# Altium PCB BoardBig2.PcbDoc
Units mil, origin at the board's own origin, x right, y up, seen from the top; angles counter-clockwise.
Board outline 6000 x 4000 mil, 2 copper layers (Top Layer, Bottom Layer); 39 components, 44 nets, 163 pads, 0 vias.
Unrouted connection lines stored in the file: 88.
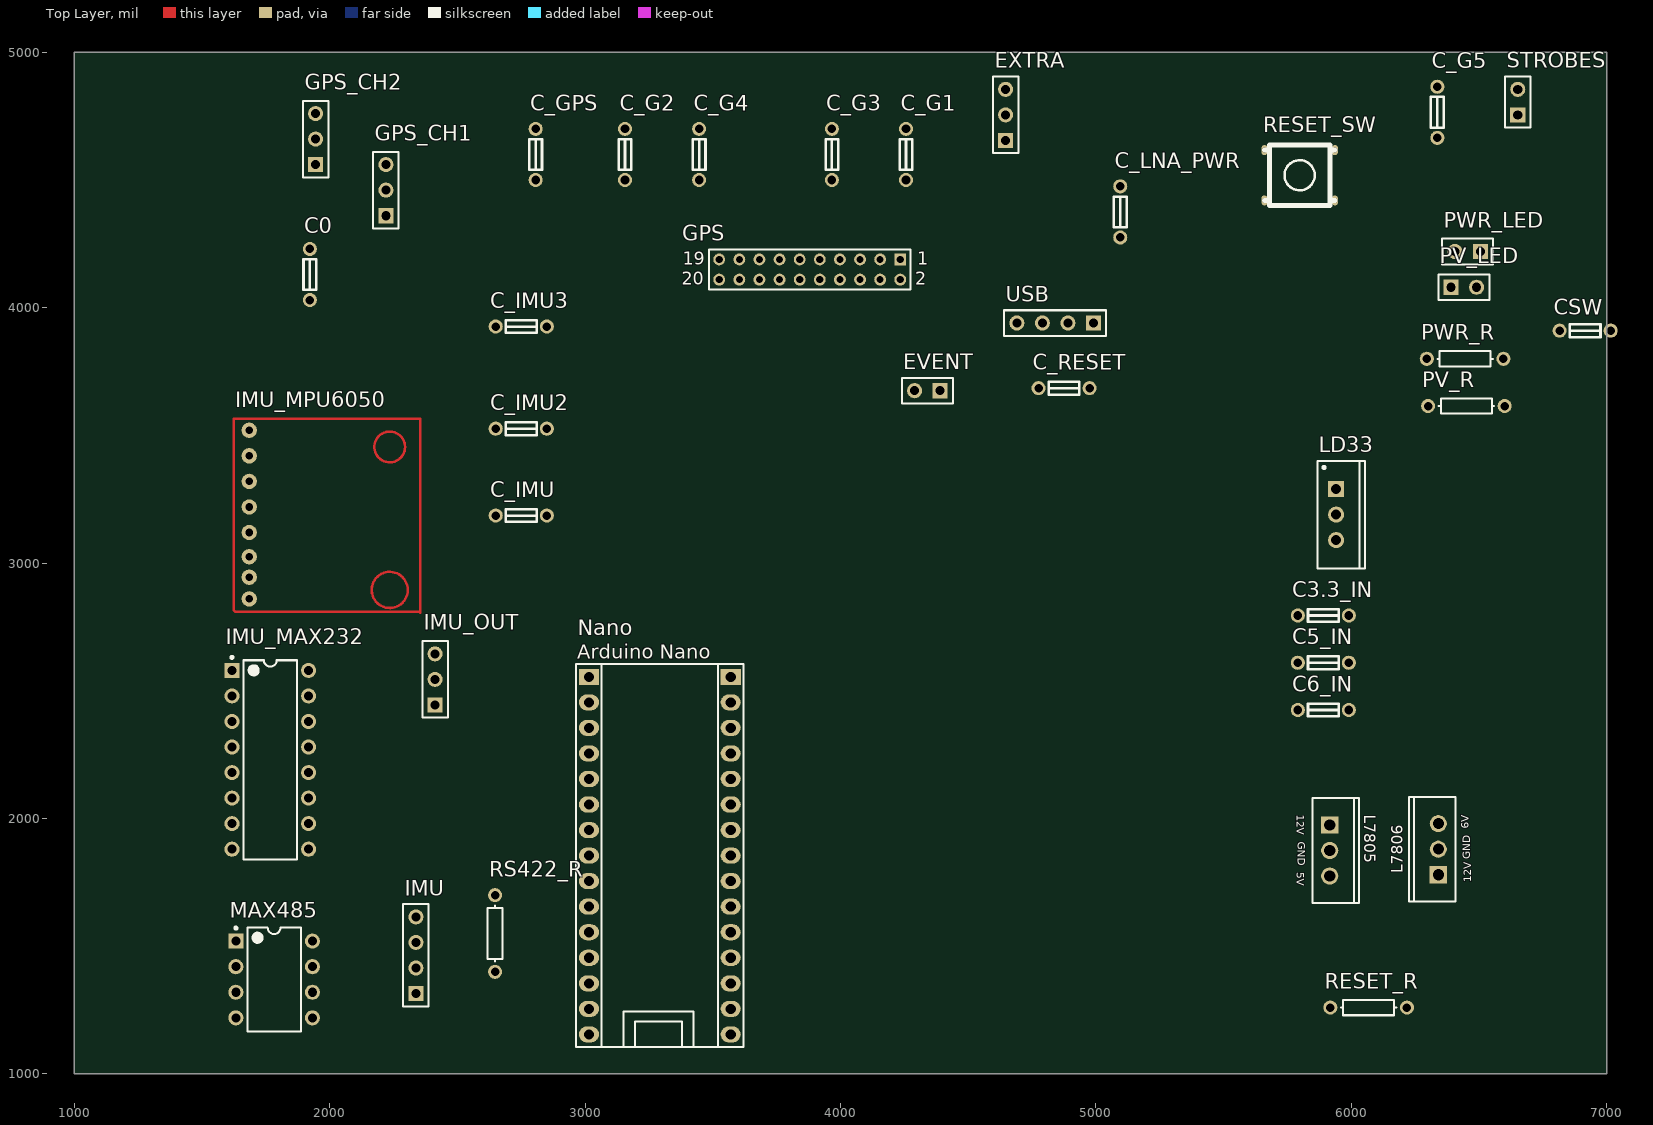
[diagram p0: Top Layer view]
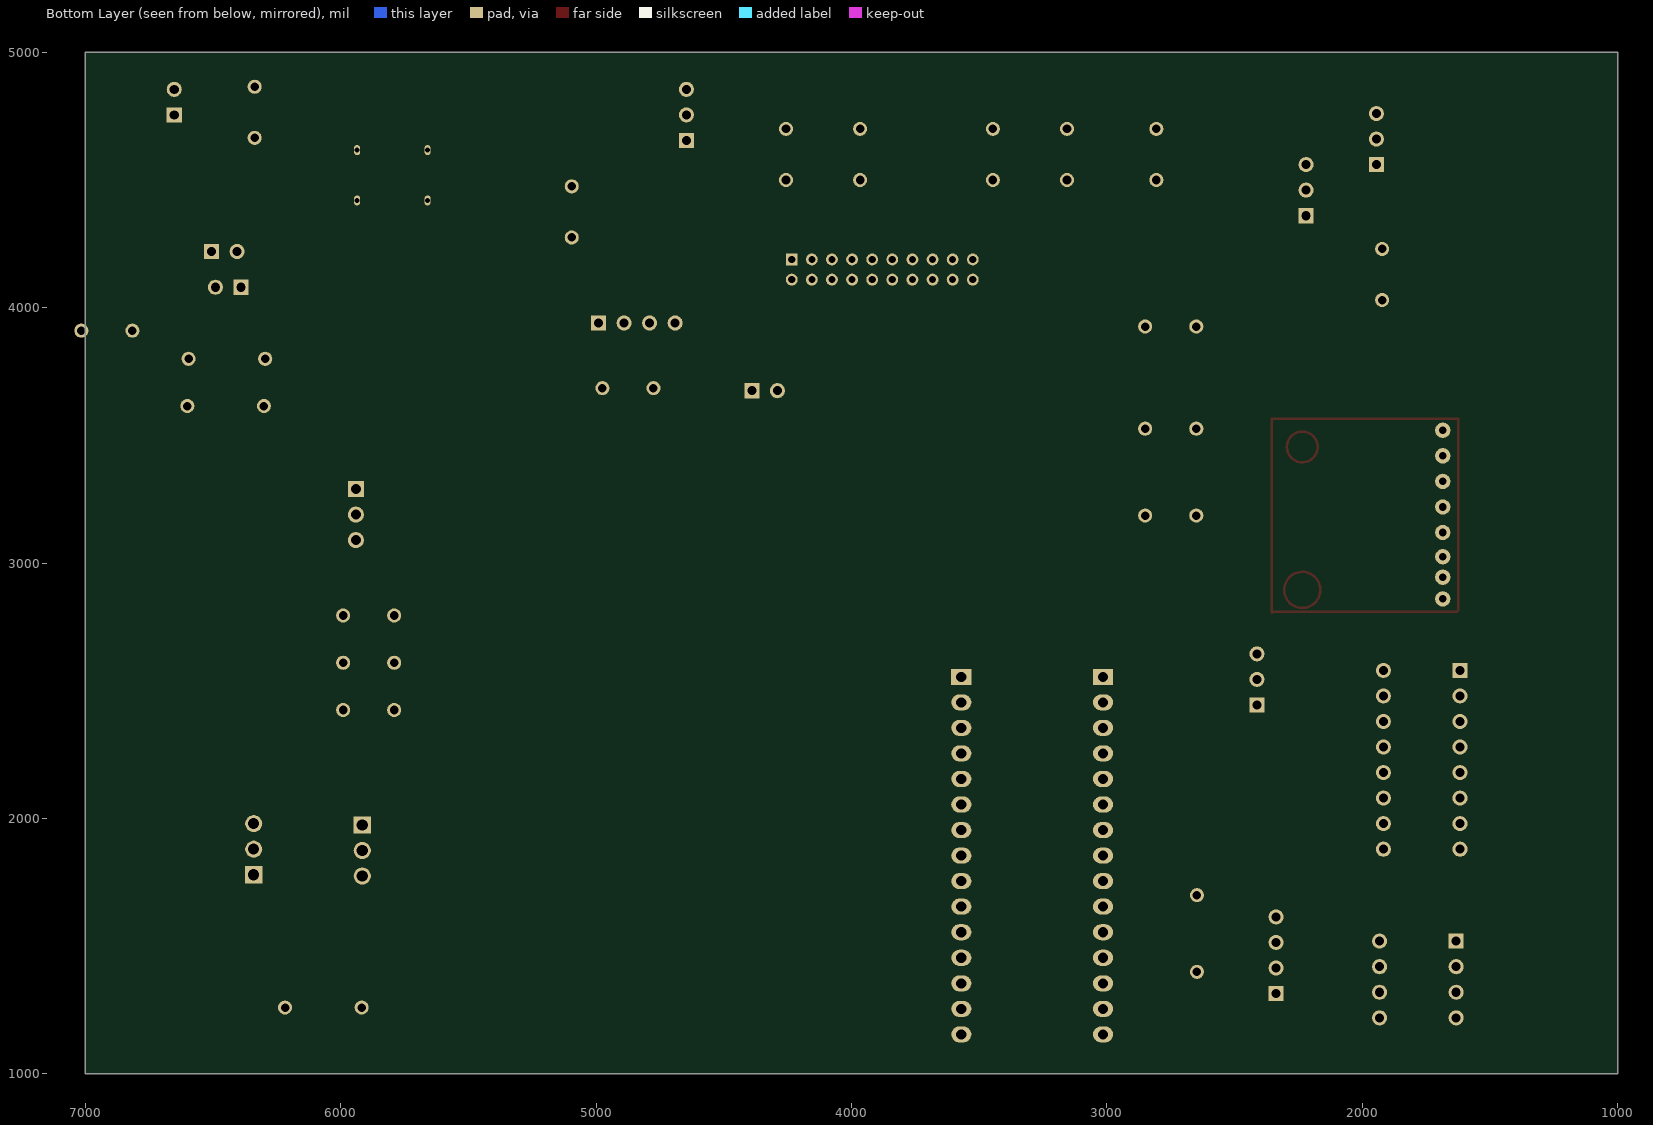
[diagram p1: Bottom Layer view, seen from below]

## Layer stack, top to bottom
Top Solder: solder mask 0.4, Solder Resist, Dk 3.5
Top Layer: signal copper 1.4
Dielectric 1: dielectric 12.6, FR-4, Dk 4.8
Bottom Layer: signal copper 1.4
Bottom Solder: solder mask 0.4, Solder Resist, Dk 3.5

## Board outline
1000,1000 7000,1000 7000,5000 1000,5000

## Design rules (kind name [scope] priority, off if disabled: settings)
Clearance [All] p1: gap=10 ignorepadtopadclearanceinfootprint=FALSE except(0: Arc-Hole Track-Hole SMDPad-Hole THPad-Hole Via-Hole Fill-Hole Poly-Hole Region-Hole Text-Hole)
PolygonConnect [All] p1: connectstyle=Relief reliefconductorwidth=10 reliefentries=4 polygonreliefangle="90 Angle" airgapwidth=10
RoomDefinition schematic [InComponentClass('schematic')] p1: confinementstyle=ConfineIn formatcopy=TRUE lockcomponents=FALSE outline 926.18,800 7557.44,800 7557.44,5015 926.18,5015
RoutingVias [All] p1: holewidth=28 width=50 viastyle="Through Hole" minholewidth=28 minwidth=50 maxholewidth=28 maxwidth=50
SolderMaskExpansion [All] p1: expansion=4
Width [All] p1: maxlimit=10 minlimit=10 preferedwidth=10
30 further rules are at their usual default settings.

## Components (designator, comment, footprint, x,y, rotation, side; value= is the part's Value field where it differs from the comment)
C0 "100nF" C_NANO_HOLES 1922.44,4030 r90 top
C3.3_IN "100nF" C_NANO_HOLES 5790,2795 r0 top
C5_IN "100nF" C_NANO_HOLES 5990,2610 r180 top
C6_IN "100nF" C_NANO_HOLES 5990,2425 r180 top
C_G1 "100nF" C_NANO_HOLES 4256.18,4500 r90 top
C_G2 "100nF" C_NANO_HOLES 3156.18,4500 r90 top
C_G3 "100nF" C_NANO_HOLES 3966.18,4500 r90 top
C_G4 "100nF" C_NANO_HOLES 3446.18,4500 r90 top
C_G5 "100nF" C_NANO_HOLES 6336.18,4665 r90 top
C_GPS "100nF" C_NANO_HOLES 2806.18,4500 r90 top
C_IMU "100nF" C_NANO_HOLES 2850,3186.18 r180 top
C_IMU2 "100nF" C_NANO_HOLES 2850,3526.18 r180 top
C_IMU3 "100nF" C_NANO_HOLES 2850,3926.18 r180 top
C_LNA_PWR "100nF" C_NANO_HOLES 5095,4275 r90 top
C_RESET "100nF" C_NANO_HOLES 4775,3685 r0 top
CSW "100nF" C_NANO_HOLES 7015,3910 r180 top
EVENT "Header 2" HDR1X2 4390,3675 r180 top
EXTRA "Header 3" HDR1X3 4646.18,4655 r90 top
GPS "Header 10X2" HDR2x10_2mm 3525,4110 r0 top
GPS_CH1 "MHDR1X3" HDR1X3 2220,4360 r90 top
GPS_CH2 "MHDR1X3" HDR1X3 1945,4560 r90 top
IMU "Header 4" HDR1X4 2337.44,1315 r90 top
IMU_MAX232 "MAX232ACPE" PE16A 1767.44,2230 r0 top
IMU_MPU6050 "MPU6050" MPU6050 1685,2860 r0 top
IMU_OUT "MHDR1X3" HDR1X3 2412.44,2445 r90 top
L7805 "L7805ACV" TO220ABN 5915,1875 r270 top
L7806 "L7806CV" TO220ABN 6340,1880 r90 top
LD33 "LD33V" T03B 5940,3190 r270 top
MAX485 "MAX485CPA" PA8 1782.44,1370 r0 top
Nano "Arduino Nano" ArduinoNano 3285,1815 r90 top
PV_LED "PV" HDR1X2 6390,4080 r0 top
PV_R "180" AXIAL-0.3 6450,3615 r0 top
PWR_LED "PWR" HDR1X2 6505,4220 r180 top
PWR_R "180" AXIAL-0.3 6445,3800 r0 top
RESET_R "4k7" AXIAL-0.3 6067.44,1260 r0 top
RESET_SW "SW-PB" PUSHBUTTON 5679.09,4400.31 r0 top
RS422_R "120" AXIAL-0.3 2647.44,1550 r90 top
STROBES "Header 2" HDR1X2 6651.18,4755 r90 top
USB "Header 4" HDR1X4 4990,3940 r180 top

## Footprints (in the part's own frame and the unit in brackets; to place one, negate y for a bottom-side part, rotate by r counter-clockwise, add the part's x,y. Pads: shape width x height; smd on the part's side, far side on the other; paste and mask are expansions set on the pad)
ArduinoNano [mm]
  rect 1.6x2 hole 1: 1(18.796,6.858) 30(18.796,-7.239)
  oval 1.6x2 hole 1: 2(16.256,6.858) 3(13.716,6.858) 4(11.176,6.858) 5(8.636,6.858) 6(6.096,6.858) 7(3.556,6.858) 8(1.016,6.858) 9(-1.524,6.858) 10(-4.064,6.858) 11(-6.604,6.858) 12(-9.144,6.858) 13(-11.684,6.858) 14(-14.224,6.858) 15(-16.764,6.858) 16(-16.764,-7.239) 17(-14.224,-7.239) 18(-11.684,-7.239) 19(-9.144,-7.239) 20(-6.604,-7.239) 21(-4.064,-7.239) 22(-1.524,-7.239) 23(1.016,-7.239) 24(3.556,-7.239) 25(6.096,-7.239) 26(8.636,-7.239) 27(11.176,-7.239) 28(13.716,-7.239) 29(16.256,-7.239)
  silkscreen extent -18.03,-8.51 20.07,8.13
AXIAL-0.3 [mm] "Axial Device, Thru-Hole; 2 Leads; 0.3 in Pin Spacing"
  round 1.4 hole 0.85: 1(-3.81,0) 2(3.81,0)
  silkscreen extent -2.77,-0.76 2.77,0.76
C_NANO_HOLES [mm] "C_NANO com furos maiores"
  round 1.4 hole 0.85: 1(0,0) 2(5.08,0)
  silkscreen extent 1.02,-0.63 4.06,0.64
HDR1X2 [mm] "Connector; Header; 2 Position"
  rect 1.5x1.5 hole 0.9: 1(0,0)
  round 1.5 hole 0.9: 2(2.54,0)
  silkscreen extent -1.27,-1.27 3.81,1.27
HDR1X3 [mm] "Connector; Header; 3 Position"
  rect 1.5x1.5 hole 0.9: 1(0,0)
  round 1.5 hole 0.9: 2(2.54,0) 3(5.08,0)
  silkscreen extent -1.27,-1.27 6.35,1.27
HDR1X4 [mm] "Connector; Header; 4 Position"
  rect 1.5x1.5 hole 0.9: 1(0,0)
  round 1.5 hole 0.9: 2(2.54,0) 3(5.08,0) 4(7.62,0)
  silkscreen extent -1.27,-1.27 8.89,1.27
HDR2x10_2mm [mm]
  rect 1.18x1.18 hole 0.71: 1(18,2)
  round 1.18 hole 0.71: 2(18,0) 3(16,2) 4(16,0) 5(14,2) 6(14,0) 7(12,2) 8(12,0) 9(10,2) 10(10,0) 11(8,2) 12(8,0) 13(6,2) 14(6,0) 15(4,2) 16(4,0) 17(2,2) 18(2,0) 19(0,2) 20(0,0)
  silkscreen extent -1,-1 19,3
MPU6050 [mil]
  round 60 hole 30: 0(0,660) 1(0,560) 2(0,460) 3(0,360) 4(0,260) 5(0,165) 6(0,85) 7(0,0)
  Top Layer circle w10: c550,35 r70.71
  Top Layer circle w10: c550,595 r60.21
  Top Layer lines w10: -60,-45 -60,705 -30,705 670,705 670,-55 665,-50 -55,-50 -60,-45
PA8 [mm] "DIP, 8-Leads, Row Spacing 7.62mm, Pitch 2.54mm, Body 9.38x7.24mm"
  rect 1.5x1.5 hole 0.9: 1(-3.81,3.81)
  round 1.5 hole 0.9: 2(-3.81,1.27) 3(-3.81,-1.27) 4(-3.81,-3.81) 5(3.81,-3.81) 6(3.81,-1.27) 7(3.81,1.27) 8(3.81,3.81)
  silkscreen extent -3.93,-5.15 2.65,5.23, body extent -3.6,-5.15 3.6,5.15, height 4.58
PE16A [mm] "DIP, 16-Leads, Row Spacing 7.62mm, Pitch 2.54mm, Body 19.18x6.99mm"
  rect 1.5x1.5 hole 0.9: 1(-3.81,8.89)
  round 1.5 hole 0.9: 2(-3.81,6.35) 3(-3.81,3.81) 4(-3.81,1.27) 5(-3.81,-1.27) 6(-3.81,-3.81) 7(-3.81,-6.35) 8(-3.81,-8.89) 9(3.81,-8.89) 10(3.81,-6.35) 11(3.81,-3.81) 12(3.81,-1.27) 13(3.81,1.27) 14(3.81,3.81) 15(3.81,6.35) 16(3.81,8.89)
  silkscreen extent -3.93,-9.9 2.65,10.31, body extent -3.3,-9.9 3.3,9.9, height 5.08
PUSHBUTTON [mm]
  oval 0.6x1 hole 0.5: 1(-0.5,0.5) 1(-0.5,5.5) 2(6.5,0.5) 2(6.5,5.5)
  silkscreen extent -0.5,0 6.5,6
T03B [mm] "TO, Thru-Hole, Vertical, Heatsink Mounted; 3 In-Line Leads; Pitch 2.54 mm"
  rect 1.6x1.6 hole 1: 1(-2.54,0)
  round 1.6 hole 1: 2(0,0) 3(2.54,0)
  silkscreen extent -5.35,-1.85 5.35,2.85, body extent -5.4,-1.9 5.4,2.9, height 19.4
TO220ABN [mm] "TO, Thru-Hole, Vertical, Heatsink Mounted; 3 In-Line Leads; Pitch 2.54 mm; Pin sequence 1, 3, 2"
  rect 1.7x1.7 hole 1.1: 1(-2.54,0)
  round 1.7 hole 1.1: 2(2.54,0) 3(0,0)
  silkscreen extent -5.2,-1.7 5.2,2.9

## Part data
C0 C3.3_IN C5_IN C6_IN C_G1 C_G2 C_G3 C_G4 C_G5 C_GPS C_IMU C_IMU2 C_IMU3 C_LNA_PWR C_RESET CSW: library part Cap, "Capacitor", LatestRevisionDate=17-Jul-2002, LatestRevisionNote="Re-released for DXP Platform.", PackageReference=RAD-0.3, Published=8-Jun-2000, Publisher="Altium Limited"
EVENT STROBES: "Header, 2-Pin", LatestRevisionDate=17-Jul-2002, LatestRevisionNote="Re-released for DXP Platform.", Publisher="Altium Limited"
EXTRA GPS_CH1 GPS_CH2 IMU_OUT: "Header, 3-Pin", LatestRevisionDate=17-Jul-2002, LatestRevisionNote="Re-released for DXP Platform.", Publisher="Altium Limited"
GPS: "Header, 10-Pin, Dual row", LatestRevisionDate=17-Jul-2002, LatestRevisionNote="Re-released for DXP Platform.", Publisher="Altium Limited"
IMU USB: "Header, 4-Pin", LatestRevisionDate=17-Jul-2002, LatestRevisionNote="Re-released for DXP Platform.", Publisher="Altium Limited"
IMU_MAX232: "+5V Powered, Multi-Channel RS-232 Driver/Receiver", Code_JEDEC=MS-001-BB, ComponentLink1Description="Manufacturer Link", ComponentLink1URL=http://www.maxim-ic.com/, ComponentLink2Description=Datasheet, ComponentLink2URL=http://pdfserv.maxim-ic.com/en/ds/MAX220-MAX249.pdf, LatestRevisionDate=06-Jun-2005, LatestRevisionNote="Stylized 3D Model Added.", PackageDescription="DIP; 16 Leads; Row Spacing 7.62 mm; Pitch 2.54 mm", PackageReference=PE16A, PackageVersion=1997, Published=16-Jan-2001, Publisher="Altium Limited"
IMU_MPU6050 Nano: library part Component_1
L7805: "Precision 1A Regulator", ComponentLink1Description="Manufacturer Link", ComponentLink1URL=http://www.st.com/, ComponentLink2Description=Datasheet, ComponentLink2URL=http://www.st.com/stonline/products/literature/ds/2144/l7805ab.pdf, DatasheetVersion=Nov-1999, LatestRevisionDate=17-Jul-2002, LatestRevisionNote="Re-released for DXP Platform.", Note="Tab is connected to pin 3 (GND).", PackageDescription="TO, Thru-Hole, Vertical, Heatsink Mounted; 3 In-Line Leads; Pitch 2.54 mm; Pin sequence 1, 3, 2", PackageReference=TO220ABN, PackageVersion=Jun-1998, Published=24-Aug-2001, Publisher="Altium Limited"
L7806: "Positive Voltage Regulator", ComponentLink1Description="Manufacturer Link", ComponentLink1URL=http://www.st.com/, DatasheetVersion=Dec-1998, LatestRevisionDate=17-Jul-2002, LatestRevisionNote="Re-released for DXP Platform.", Note="Tab is connected to pin 3 (GND).", PackageDescription="TO, Thru-Hole, Vertical, Heatsink Mounted; 3 In-Line Leads; Pitch 2.54 mm; Pin sequence 1, 3, 2", PackageReference=TO220ABN, PackageVersion=Jun-1998, Published=24-Aug-2001, Publisher="Altium Limited"
LD33: library part LM1117T-3.3, "800mA Low-Dropout Linear Regulator", DigiKeyPartNumber=LM1117T-3.3-ND, Manufacturer="National Semiconductor", PackageTopMarking=NSUZXYTTE#*LM1117T*3.3, ComponentLink1Description="LM1117 Datasheet", ComponentLink1URL=http://www.national.com/ds/LM/LM1117.pdf, ComponentLink2Description="LM1117 Web Page", ComponentLink2URL=http://www.national.com/pf/LM/LM1117.html, ComponentLink3Description="T03B Package Page", ComponentLink3URL=http://www.national.com/packaging/folders/t03b.html, CompType="LDO IC", DatasheetVersion=Apr-2006, PackageDescription="TO-220, Molded, 3 Lead, Straight", PackageReference=T03B, PackageVersion="revL, Jan-1992", PartNumber=LM1117T-3.3, PinCount=3, Published=4-Dec-2008, Publisher="Altium Limited", RoHS=O
MAX485: "Low-Power, Slew-Rate-Limited RS-485/RS-422 Transceiver", Code_JEDEC=MS-001-AB, ComponentLink1Description="Manufacturer Link", ComponentLink1URL=http://www.maxim-ic.com/, ComponentLink2Description=Datasheet, ComponentLink2URL=http://pdfserv.maxim-ic.com/en/ds/MAX1487-MAX491.pdf, DatasheetVersion=Feb-1996, LatestRevisionDate=29-May-2009, LatestRevisionNote="Component Body Added.", PackageDescription="DIP, 8-Pin, Row Spacing 7.62 mm, Pitch 2.54 mm", PackageReference=PA8, PackageVersion="RevB, 21-0043", Published=16-Jan-2001, Publisher="Altium Limited"
PV_LED PWR_LED: library part LED0, "Typical INFRARED GaAs LED", LatestRevisionDate=08-Jul-2005, LatestRevisionNote="Mech Layer 1 removed.", PackageReference=LED-0, Published=8-Jun-2000, Publisher="Altium Limited"
PV_R PWR_R RESET_R RS422_R: library part Res1, "Resistor", LatestRevisionDate=17-Jul-2002, LatestRevisionNote="Re-released for DXP Platform.", PackageReference=AXIAL-0.3, Published=8-Jun-2000, Publisher="Altium Limited"
RESET_SW: "Switch", LatestRevisionDate=17-Jul-2002, LatestRevisionNote="Re-released for DXP Platform.", PackageReference=SPST-2, Published=24-Mar-1999, Publisher="Altium Limited"

## Nets (pads, with @x,y where several pads share a name; then routed paths per layer and width w, separated by ;. In a path a pad name is that pad's centre, name@x,y a point inside that pad or via, vN(x,y) a via of type N, cw(c..) or ccw(c..) an arc to the next point about the centre after c; other vN are vias at no path point)
3.3V: C_G3.2 C_GPS.2 GPS.2 LD33.2 PWR_R.2 RESET_R.2
5V: C0.2 C3.3_IN.1 IMU_MAX232.16 IMU_MPU6050.0 L7805.2 LD33.3 MAX485.8 USB.4
6V: C_IMU2.2 C_IMU3.2 C_IMU.2 IMU.1 L7806.2 Nano.30
12V: C5_IN.1 C6_IN.1 C_LNA_PWR.2 CSW.2 GPS.1 L7805.1 L7806.1
GND: C0.1 C3.3_IN.2 C5_IN.2 C6_IN.2 C_G3.1 C_G4.1 C_G5.1 C_GPS.1 C_IMU2.1 C_IMU3.1 C_IMU.1 C_LNA_PWR.1 C_RESET.1 GPS.10 GPS.13 GPS.16 GPS.18 GPS_CH1.3 GPS_CH2.3 IMU.2 IMU_MAX232.15 IMU_MPU6050.1 IMU_OUT.3 L7805.3 L7806.3 LD33.1 MAX485.2 MAX485.3 MAX485.4 MAX485.5 Nano.4 Nano.29 PV_LED.2 PWR_LED.2 RESET_SW.1 USB.1
GPS_CAN2_RX: EXTRA.2 GPS.8
GPS_CAN2_TX: EXTRA.3 GPS.20
GPS_COM1_RX: GPS.15
GPS_COM1_TX: GPS.14
GPS_COM2_RX: GPS.12
GPS_COM2_TX: GPS.11
GPS_Event1: EVENT.1 GPS.9
GPS_Event2: EVENT.2 GPS.7
GPS_PPS: GPS.19 STROBES.2
GPS_PV: GPS.17 PV_R.2 STROBES.1
GPS_RESETIN: C_RESET.2 GPS.5 RESET_R.1 RESET_SW.2
GPS_USB_D+: GPS.4 USB.3
GPS_USB_D-: GPS.3 USB.2
GPS_VARF: EXTRA.1 GPS.6
IMU_HRS_A: IMU.3 MAX485.6 RS422_R.1
IMU_HRS_B: IMU.4 MAX485.7 RS422_R.2
IMU_TX: IMU_MAX232.11 MAX485.1
J1_RX: GPS_CH1.2 Nano.5
J1_TX: GPS_CH1.1 Nano.6
J2_RX: GPS_CH2.2 Nano.7
J2_TX: GPS_CH2.1 Nano.8
J3_RX: IMU_MAX232.14 IMU_OUT.2 Nano.9
NetC_G1_1: C_G1.1
NetC_G1_2: C_G1.2
NetC_G2_1: C_G2.1
NetC_G2_2: C_G2.2
NetC_G4_2: C_G4.2
NetC_G5_2: C_G5.2
NetC_I1_1: IMU_MAX232.1
NetC_I1_2: IMU_MAX232.3
NetC_I2_1: IMU_MAX232.4
NetC_I2_2: IMU_MAX232.5
NetC_I3_1: IMU_MAX232.2
NetC_I5_2: IMU_MAX232.6
NetPV_LED_1: PV_LED.1 PV_R.1
NetPWR_LED_1: PWR_LED.1 PWR_R.1
PWR_SW_2: CSW.1
SCL_MPU6050: IMU_MPU6050.2 Nano.24
SDA_MPU6050: IMU_MPU6050.3 Nano.23
pads on no net: IMU_MAX232.7 IMU_MAX232.8 IMU_MAX232.9 IMU_MAX232.10 IMU_MAX232.12 IMU_MAX232.13 IMU_MPU6050.4 IMU_MPU6050.5 IMU_MPU6050.6 IMU_MPU6050.7 IMU_OUT.1 Nano.1 Nano.2 Nano.3 Nano.10 Nano.11 Nano.12 Nano.13 Nano.14 Nano.15 Nano.16 Nano.17 Nano.18 Nano.19 Nano.20 Nano.21 Nano.22 Nano.25 Nano.26 Nano.27 Nano.28

## Text inside footprints (layer, text, board x,y; h text height)
GPS: Top Overlay "2" at 4292.72,4090.31 h50; Top Overlay "1" at 4301.05,4169.06 h50; Top Overlay "19" at 3383.04,4169.06 h50; Top Overlay "20" at 3378.87,4090.31 h50
L7805: Top Overlay "GND" at 5790,1910 h30 r270; Top Overlay "5V" at 5785,1790 h30 r270; Top Overlay "12V" at 5785,2015 h30 r270
L7806: Top Overlay "GND" at 6465,1840 h30 r90; Top Overlay "6V" at 6460,1960 h30 r90; Top Overlay "12V" at 6470,1750 h30 r90